# EAGLE board rgbamp (EAGLE 6.1)
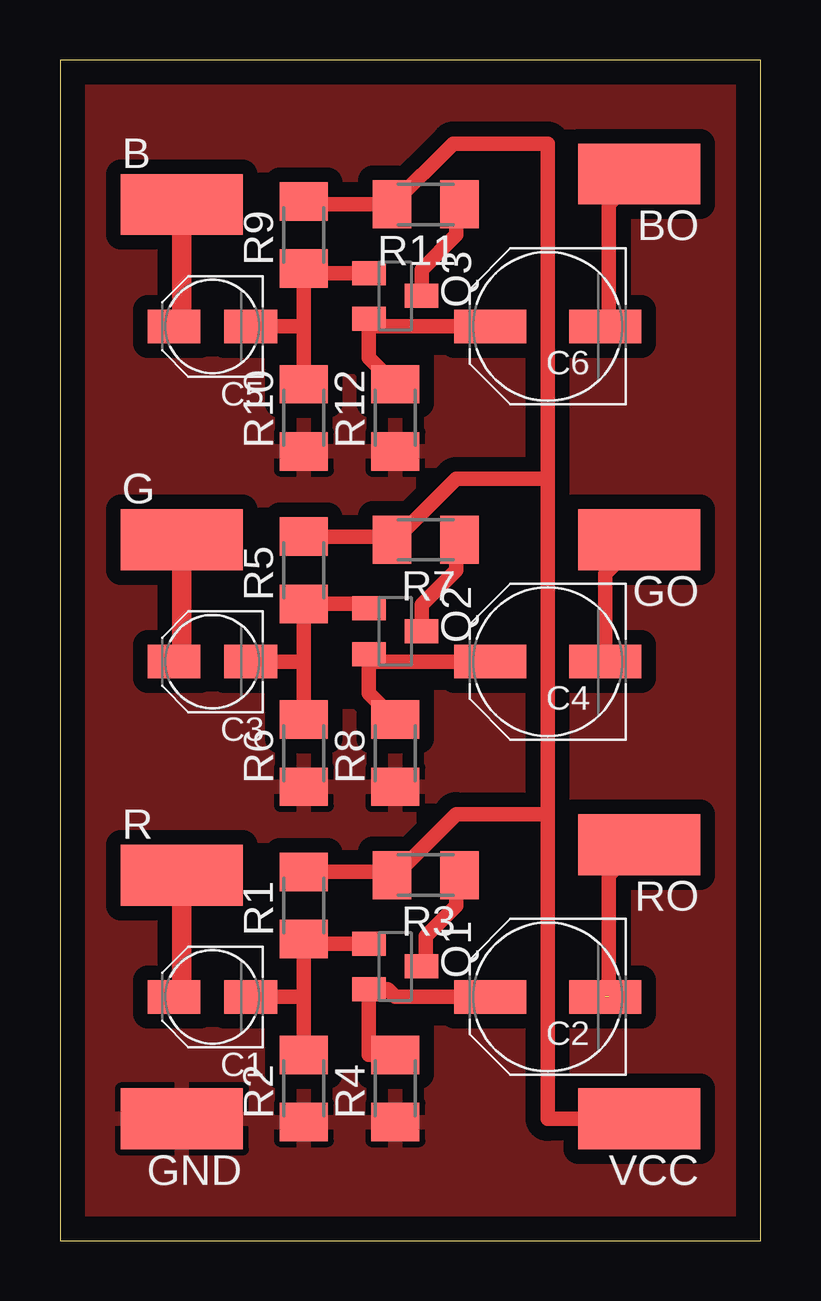
[diagram p0: board, top side]

Size 29.19 x 49.2 mm. Coordinates in mm from the lower left corner, seen from the top.
Outline: 0,0 29.19,0 29.19,49.2 0,49.2 0,0
Copper layers (1*16): Top 0.035mm / dielectric 1.5mm / Bottom 0.035mm
Design rules: minimum track width 10mil, minimum drill 24mil, track to track 8mil, track to pad 8mil, pad to pad 8mil, via to via 8mil, smd to smd 8mil, copper to edge 40mil, drill to drill 8mil, minimum pad ring 10mil, minimum via ring 8mil, stop-mask expansion 4mil, vias tented up to drill 0mil, thermal gap 10mil

## Footprints (pad centres in the part's own frame; a part is rotated, then mirrored left to right if it is on the bottom)
SMD2,54-5,08 = smd 2.54 x 5.08: 1 0,0
PANASONIC_B = smd 2.2 x 1.4: + 1.6,0; - -1.6,0
PANASONIC_D = smd 3 x 1.4: + 2.4,0; - -2.4,0
SOT23-BEC = smd 1 x 1.4: B -0.95,-1.1; C 0,1.1; E 0.95,-1.1
M1206 = smd 1.6 x 2: 1 -1.4,0; 2 1.4,0

## Placement (x,y rotation side)
B  WIREPADSMD2,54-5,08  [SMD2,54-5,08]  5.08,43.18 270 top
BO  WIREPADSMD2,54-5,08  [SMD2,54-5,08]  24.13,44.45 90 top
C1  10u  [PANASONIC_B]  6.35,10.16 180 top
C2  220u  [PANASONIC_D]  20.32,10.16 180 top
C3  10u  [PANASONIC_B]  6.35,24.13 180 top
C4  220u  [PANASONIC_D]  20.32,24.13 180 top
C5  10u  [PANASONIC_B]  6.35,38.1 180 top
C6  220u  [PANASONIC_D]  20.32,38.1 180 top
G  WIREPADSMD2,54-5,08  [SMD2,54-5,08]  5.08,29.21 270 top
GND  WIREPADSMD2,54-5,08  [SMD2,54-5,08]  5.08,5.08 90 top
GO  WIREPADSMD2,54-5,08  [SMD2,54-5,08]  24.13,29.21 90 top
Q1  BC817-16LT1SMD  [SOT23-BEC]  13.97,11.43 270 top
Q2  BC817-16LT1SMD  [SOT23-BEC]  13.97,25.4 270 top
Q3  BC817-16LT1SMD  [SOT23-BEC]  13.97,39.37 270 top
R  WIREPADSMD2,54-5,08  [SMD2,54-5,08]  5.08,15.24 270 top
R1  10k  [M1206]  10.16,13.97 90 top
R2  10k  [M1206]  10.16,6.35 90 top
R3  10  [M1206]  15.24,15.24 180 top
R4  75  [M1206]  13.97,6.35 90 top
R5  10k  [M1206]  10.16,27.94 90 top
R6  10k  [M1206]  10.16,20.32 90 top
R7  10  [M1206]  15.24,29.21 180 top
R8  75  [M1206]  13.97,20.32 90 top
R9  10k  [M1206]  10.16,41.91 90 top
R10  10k  [M1206]  10.16,34.29 90 top
R11  10  [M1206]  15.24,43.18 180 top
R12  75  [M1206]  13.97,34.29 90 top
RO  WIREPADSMD2,54-5,08  [SMD2,54-5,08]  24.13,16.51 90 top
VCC  WIREPADSMD2,54-5,08  [SMD2,54-5,08]  24.13,5.08 90 top

## Library data of the parts
B BO G GND GO R RO VCC = wirepad
C1-C6 R1-R12 = resistor
Q1-Q3 = transistor-npn

## Nets
+5V: R1.2 R3.2 R5.2 R7.2 R9.2 R11.2 VCC.1
BIN: B.1 C5.+
BOUT: BO.1 C6.-
GIN: C3.+ G.1
GND: GND.1 R2.1 R4.1 R6.1 R8.1 R10.1 R12.1
GOUT: C4.- GO.1
N$1: C1.- Q1.B R1.1 R2.2
N$2: C2.+ Q1.E R4.2
N$3: C3.- Q2.B R5.1 R6.2
N$4: Q1.C R3.1
N$5: Q2.C R7.1
N$6: Q2.E R8.2
N$7: C5.- Q3.B R9.1 R10.2
N$8: Q3.C R11.1
N$9: C6.+ Q3.E R12.2
RIN: C1.+ R.1
ROUT: C2.- RO.1

## Tracks (layer width: path | path; a pad name or v marks a point on that pad's centre or on a via)
+5V
  Top 0.61: R9.2 10.29,43.18 R11.2 16.38,45.72 20.32,45.72 20.32,31.75 | R5.2 13.71,29.34 R7.2 13.97,29.21 16.51,31.75 20.32,31.75 | R1.2 13.71,15.37 R3.2 13.97,15.24 16.51,17.78 20.32,17.78 | 20.32,17.78 20.32,31.75 | VCC.1 20.32,5.08 20.32,17.78
BIN
  Top 0.813: B.1 5.08,38.66 C5.+
BOUT
  Top 0.61: BO.1 22.86,43.18 22.86,38.24 C6.-
GIN
  Top 0.813: G.1 5.08,24.69 C3.+
GND
  pour Top (isolate 0.61): -2.54,52.07 31.75,52.07 31.75,-3.81 -2.54,-3.81
GOUT
  Top 0.61: C4.- 22.72,27.8 GO.1
N$1
  Top 0.61: C1.- 10.16,10.16 | 10.16,10.16 R2.2 | 10.16,10.16 R1.1 10.16,12.38 Q1.B
N$2
  Top 0.61: R4.2 12.87,7.75 Q1.E 13.65,10.48 13.97,10.16 C2.+
N$3
  Top 0.61: R6.2 10.16,24.13 | 10.16,24.13 R5.1 12.68,26.54 Q2.B | C3.- 10.16,24.13
N$4
  Top 0.61: R3.1 16.51,15.24 16.51,13.97 15.24,12.7 15.24,11.6 Q1.C
N$5
  Top 0.61: Q2.C 15.07,26.5 16.51,27.94 16.51,29.08 R7.1
N$6
  Top 0.61: R8.2 12.87,22.82 Q2.E 13.19,24.13 18.34,24.13
N$7
  Top 0.61: 10.16,38.1 R9.1 10.35,40.32 Q3.B | 10.16,38.1 R10.2 | C5.- 10.16,38.1
N$8
  Top 0.61: Q3.C 15.07,40.47 16.51,41.91 16.51,43.05 R11.1
N$9
  Top 0.61: R12.2 12.87,36.79 Q3.E 13.19,38.1 C6.+
RIN
  Top 0.813: R.1 5.08,10.72 C1.+
ROUT  (1 unrouted)
  Top 0.61: RO.1 22.86,15.24 22.86,10.16